# Altium PCB mdap4.PcbDoc (part 1 of 2)
Units mil, origin at the board's own origin, x right, y up, seen from the top; angles counter-clockwise.
Board outline 1970 x 1970 mil, 4 copper layers (Top Layer, Internal Plane 1, Signal Layer 1, Bottom Layer), stack 45.004 mil thick; 152 components, 121 nets, 477 pads, 250 vias.
Unrouted connection lines stored in the file: 1.
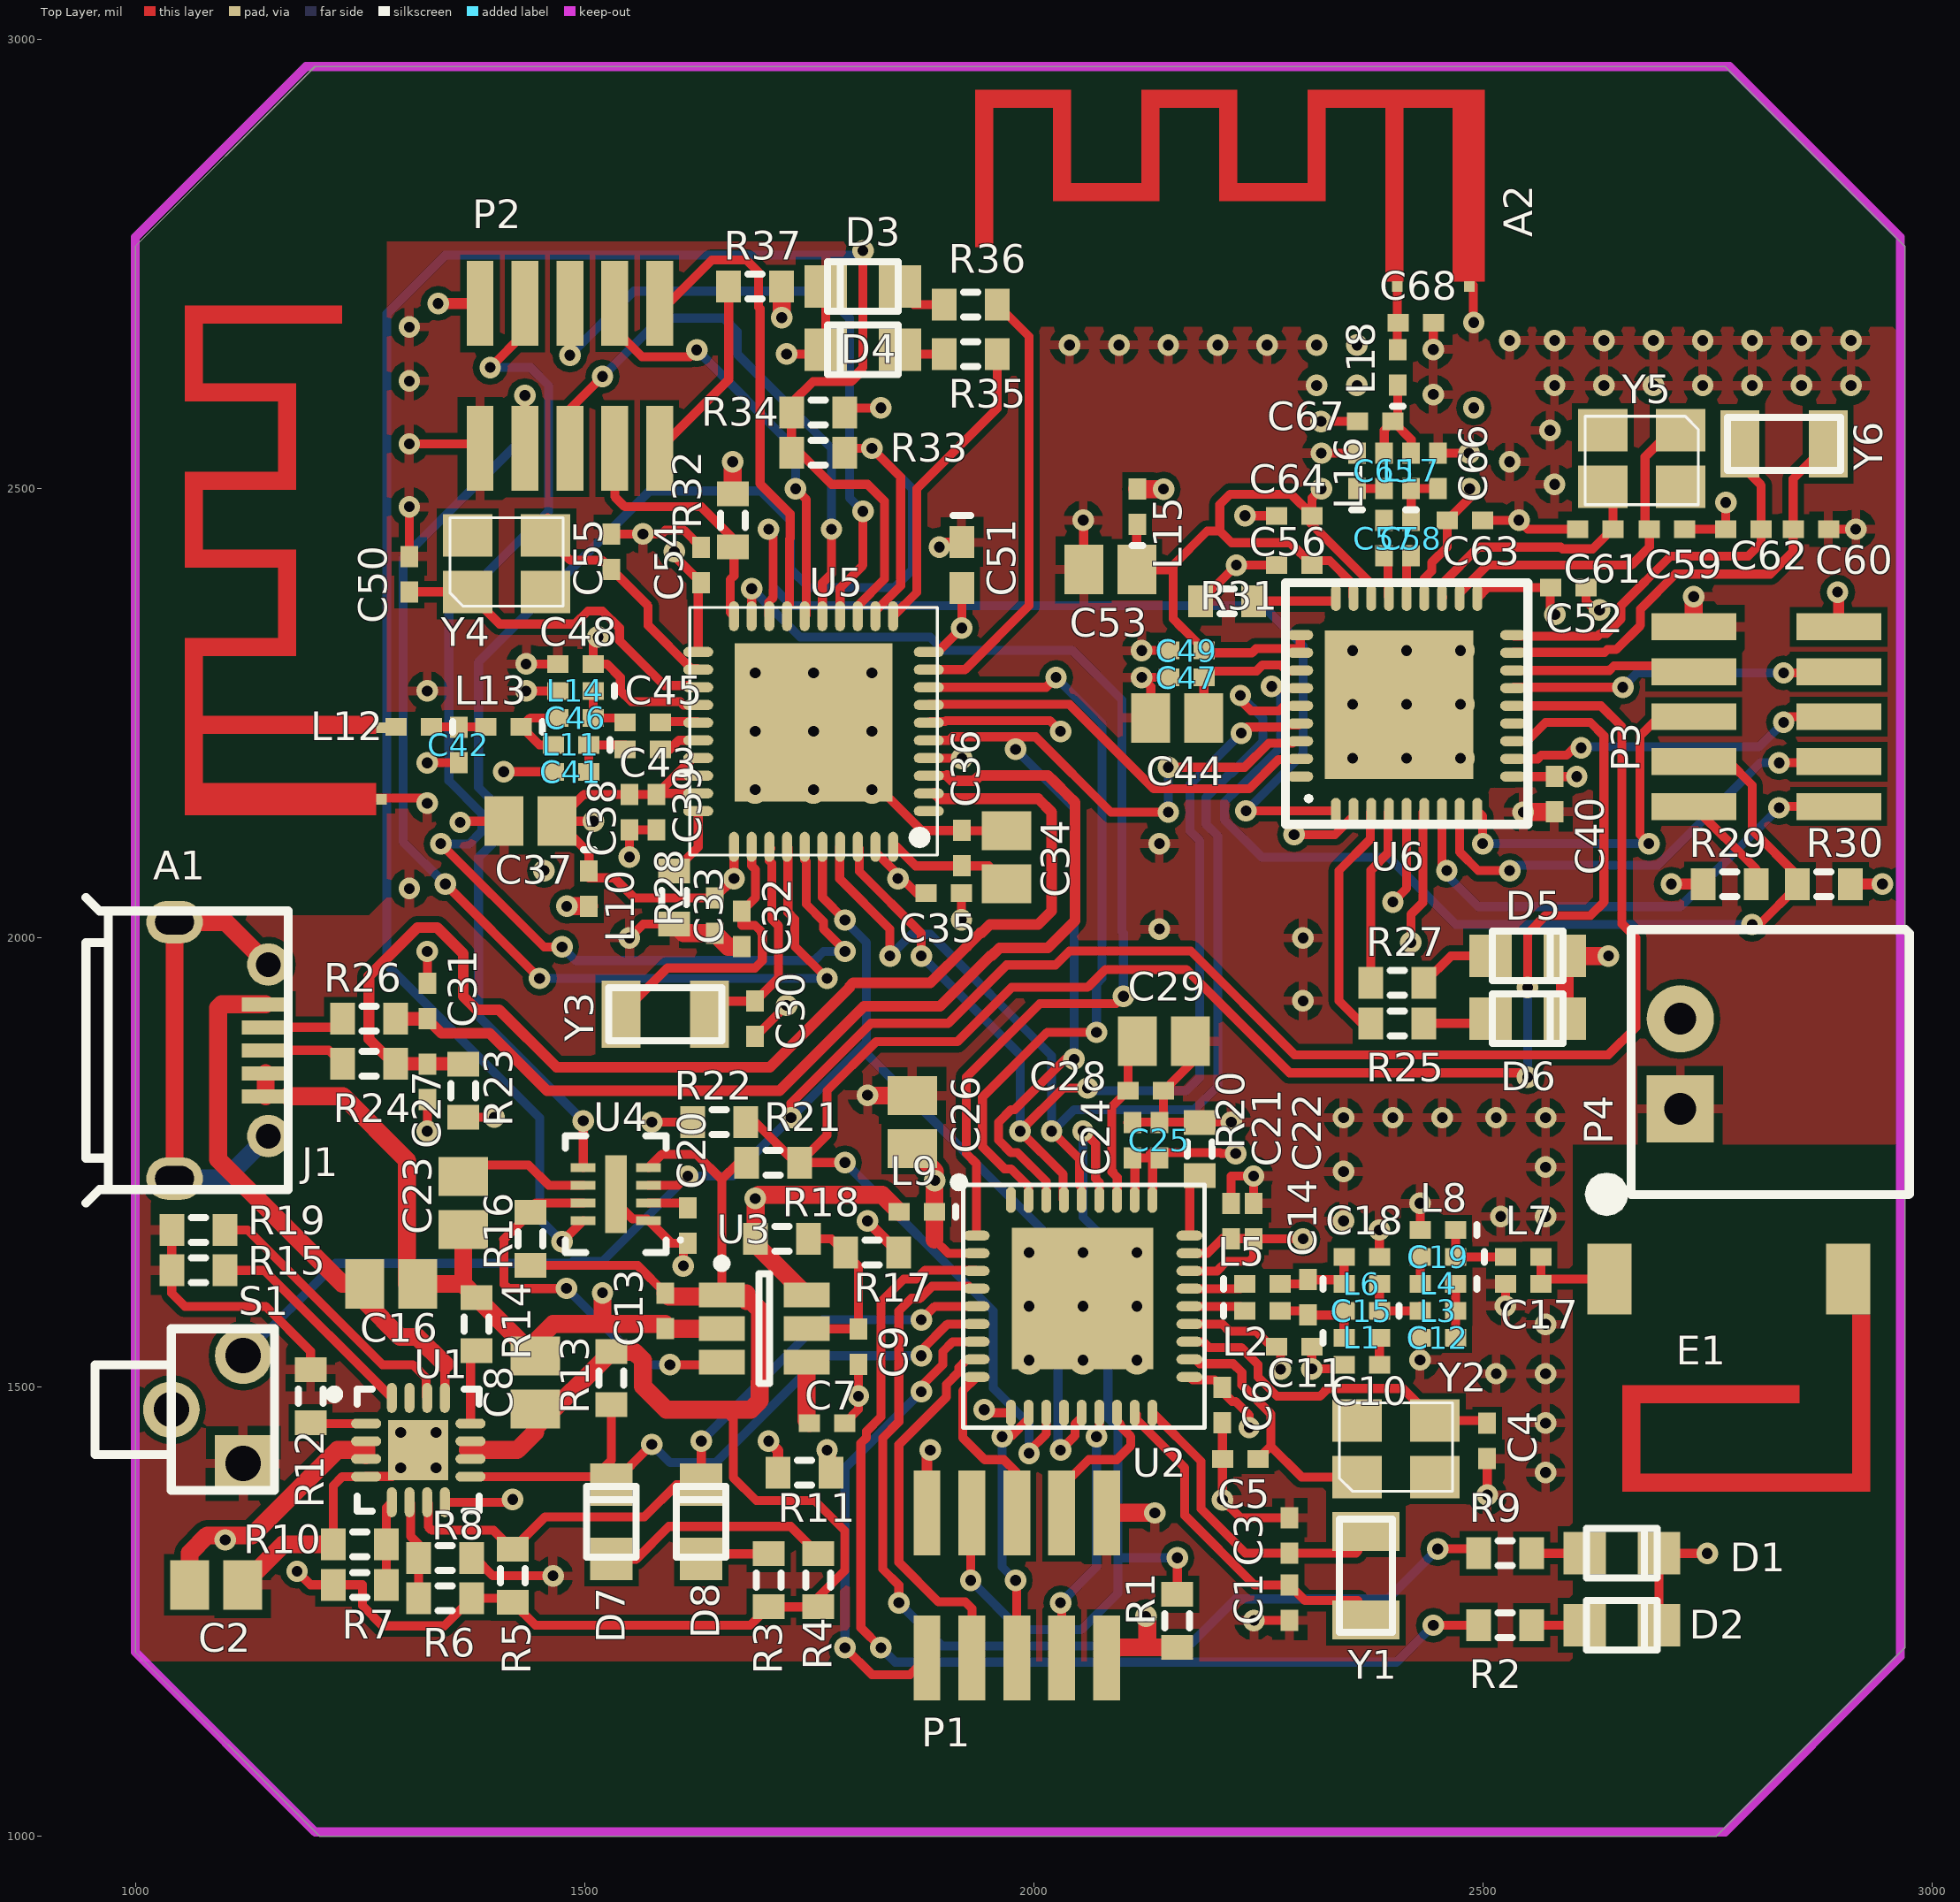
[diagram p0: Top Layer view]
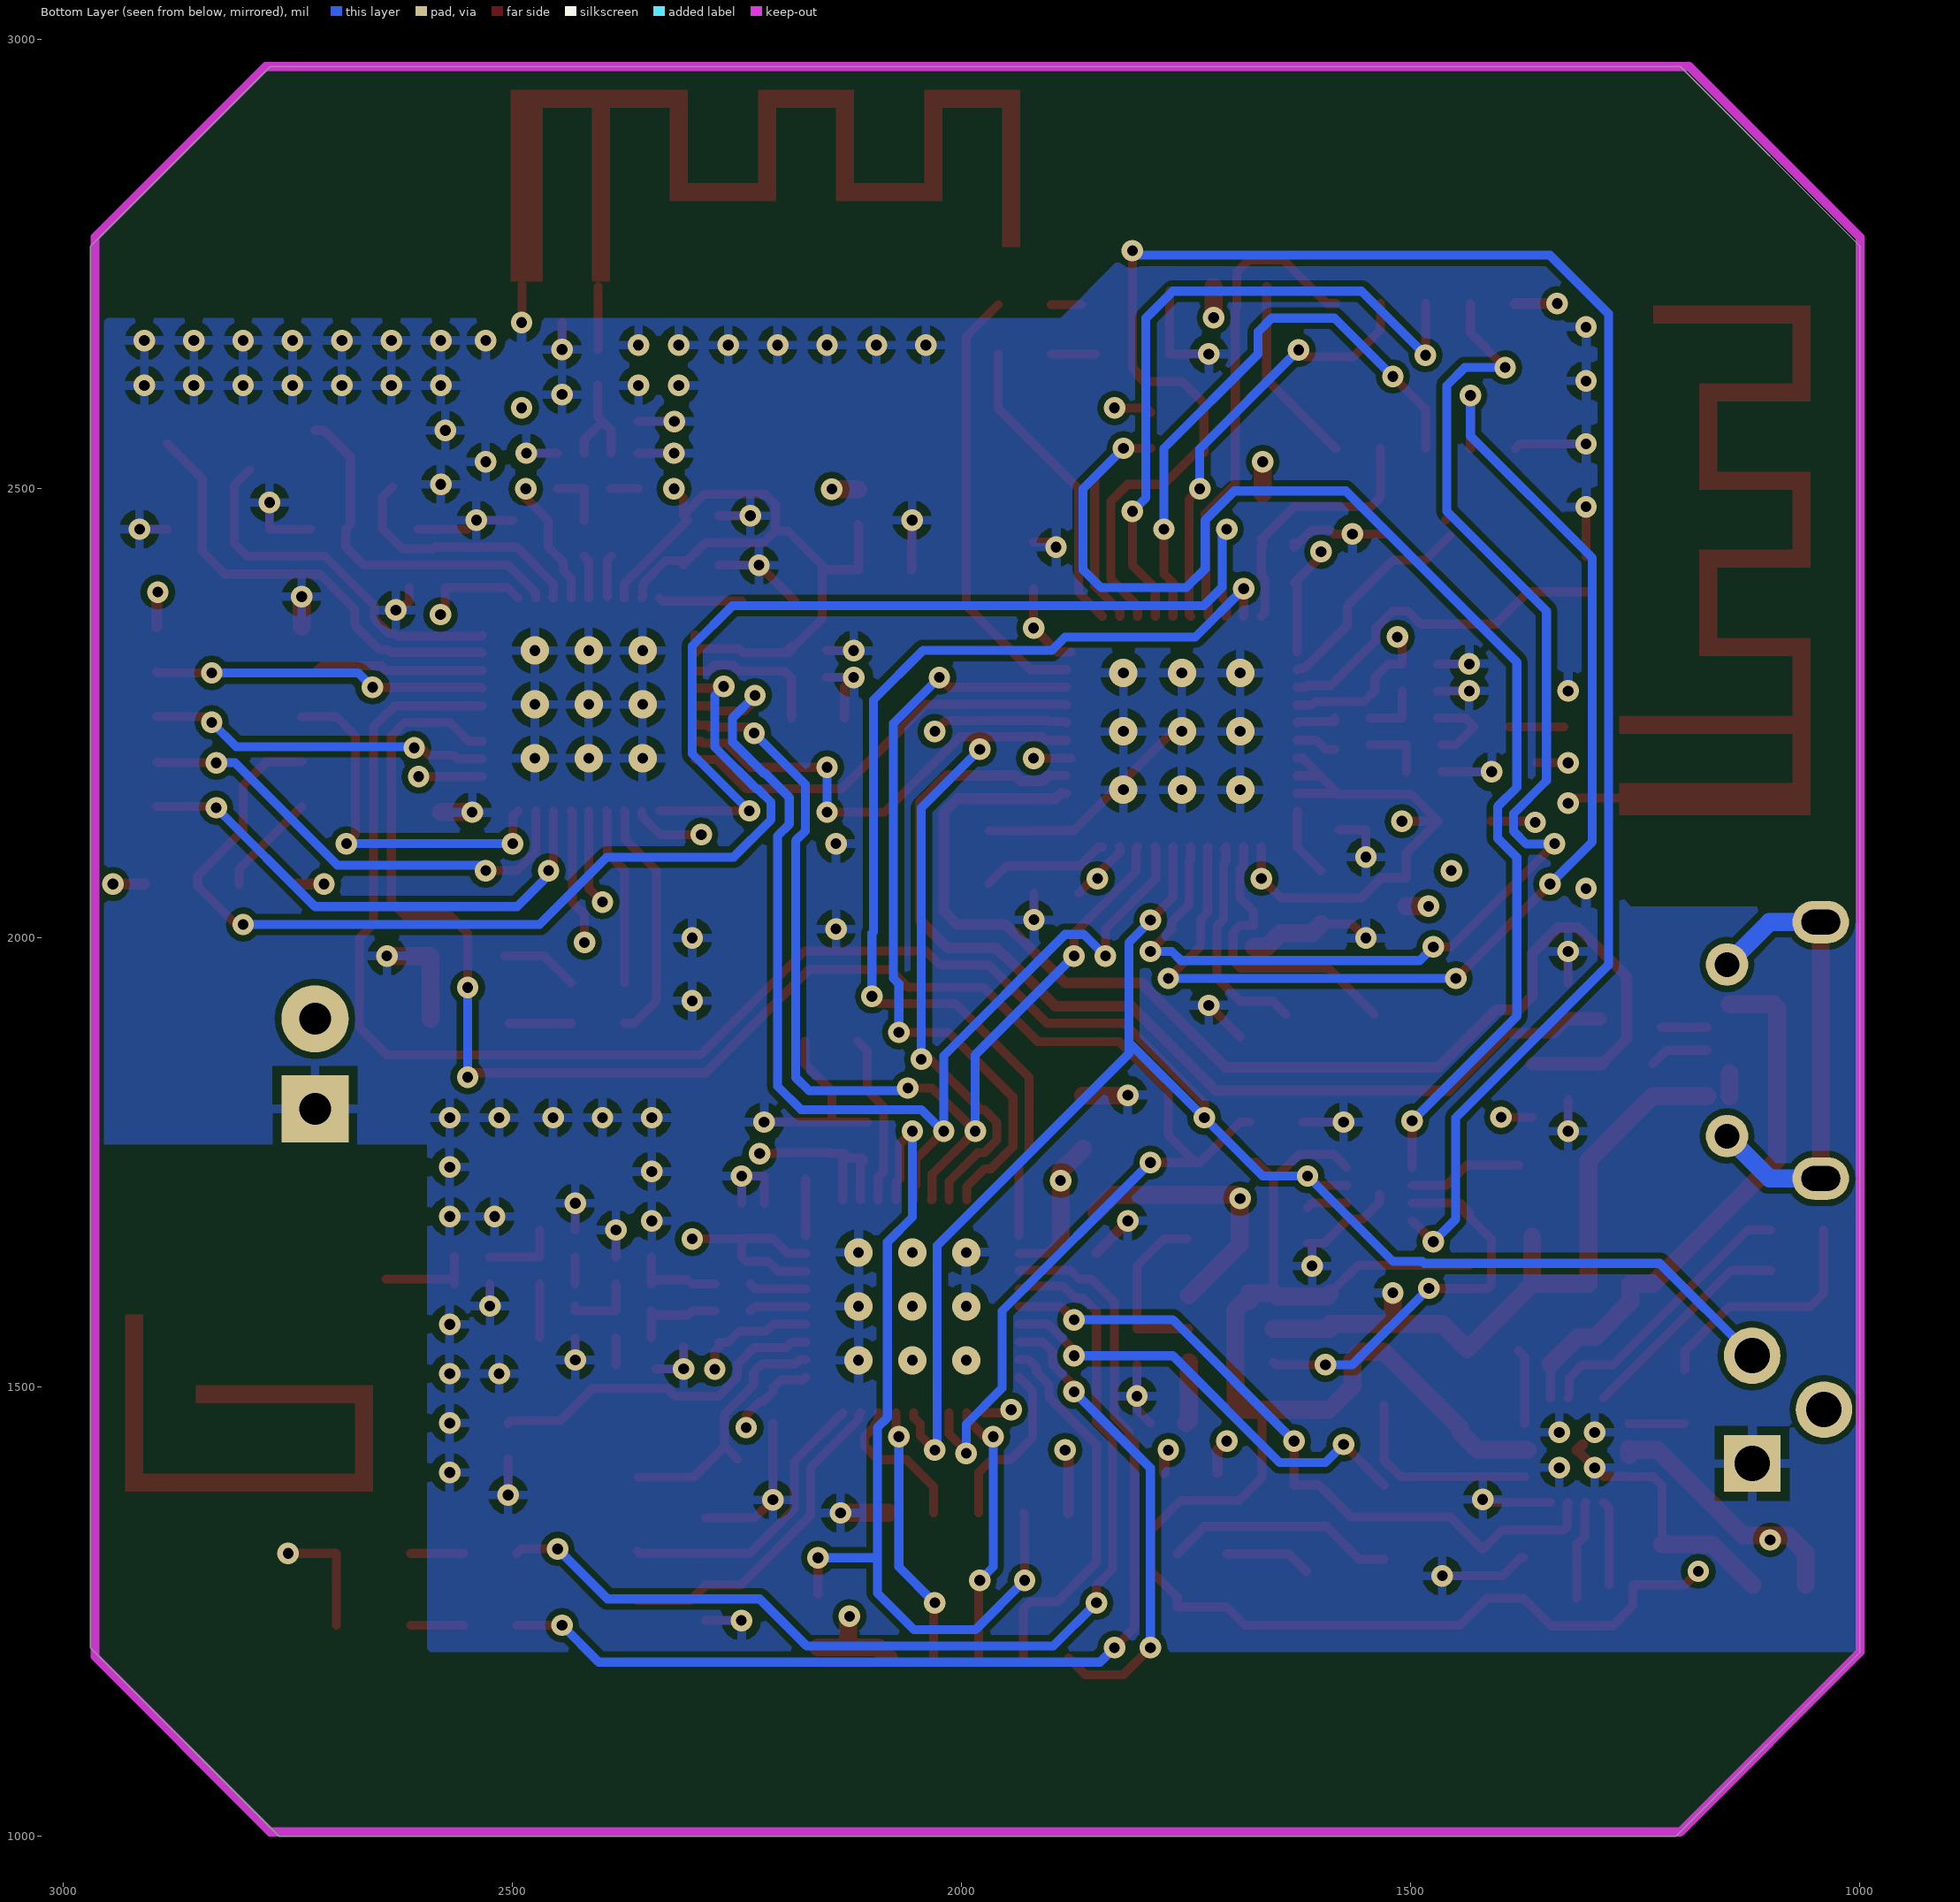
[diagram p1: Bottom Layer view, seen from below]
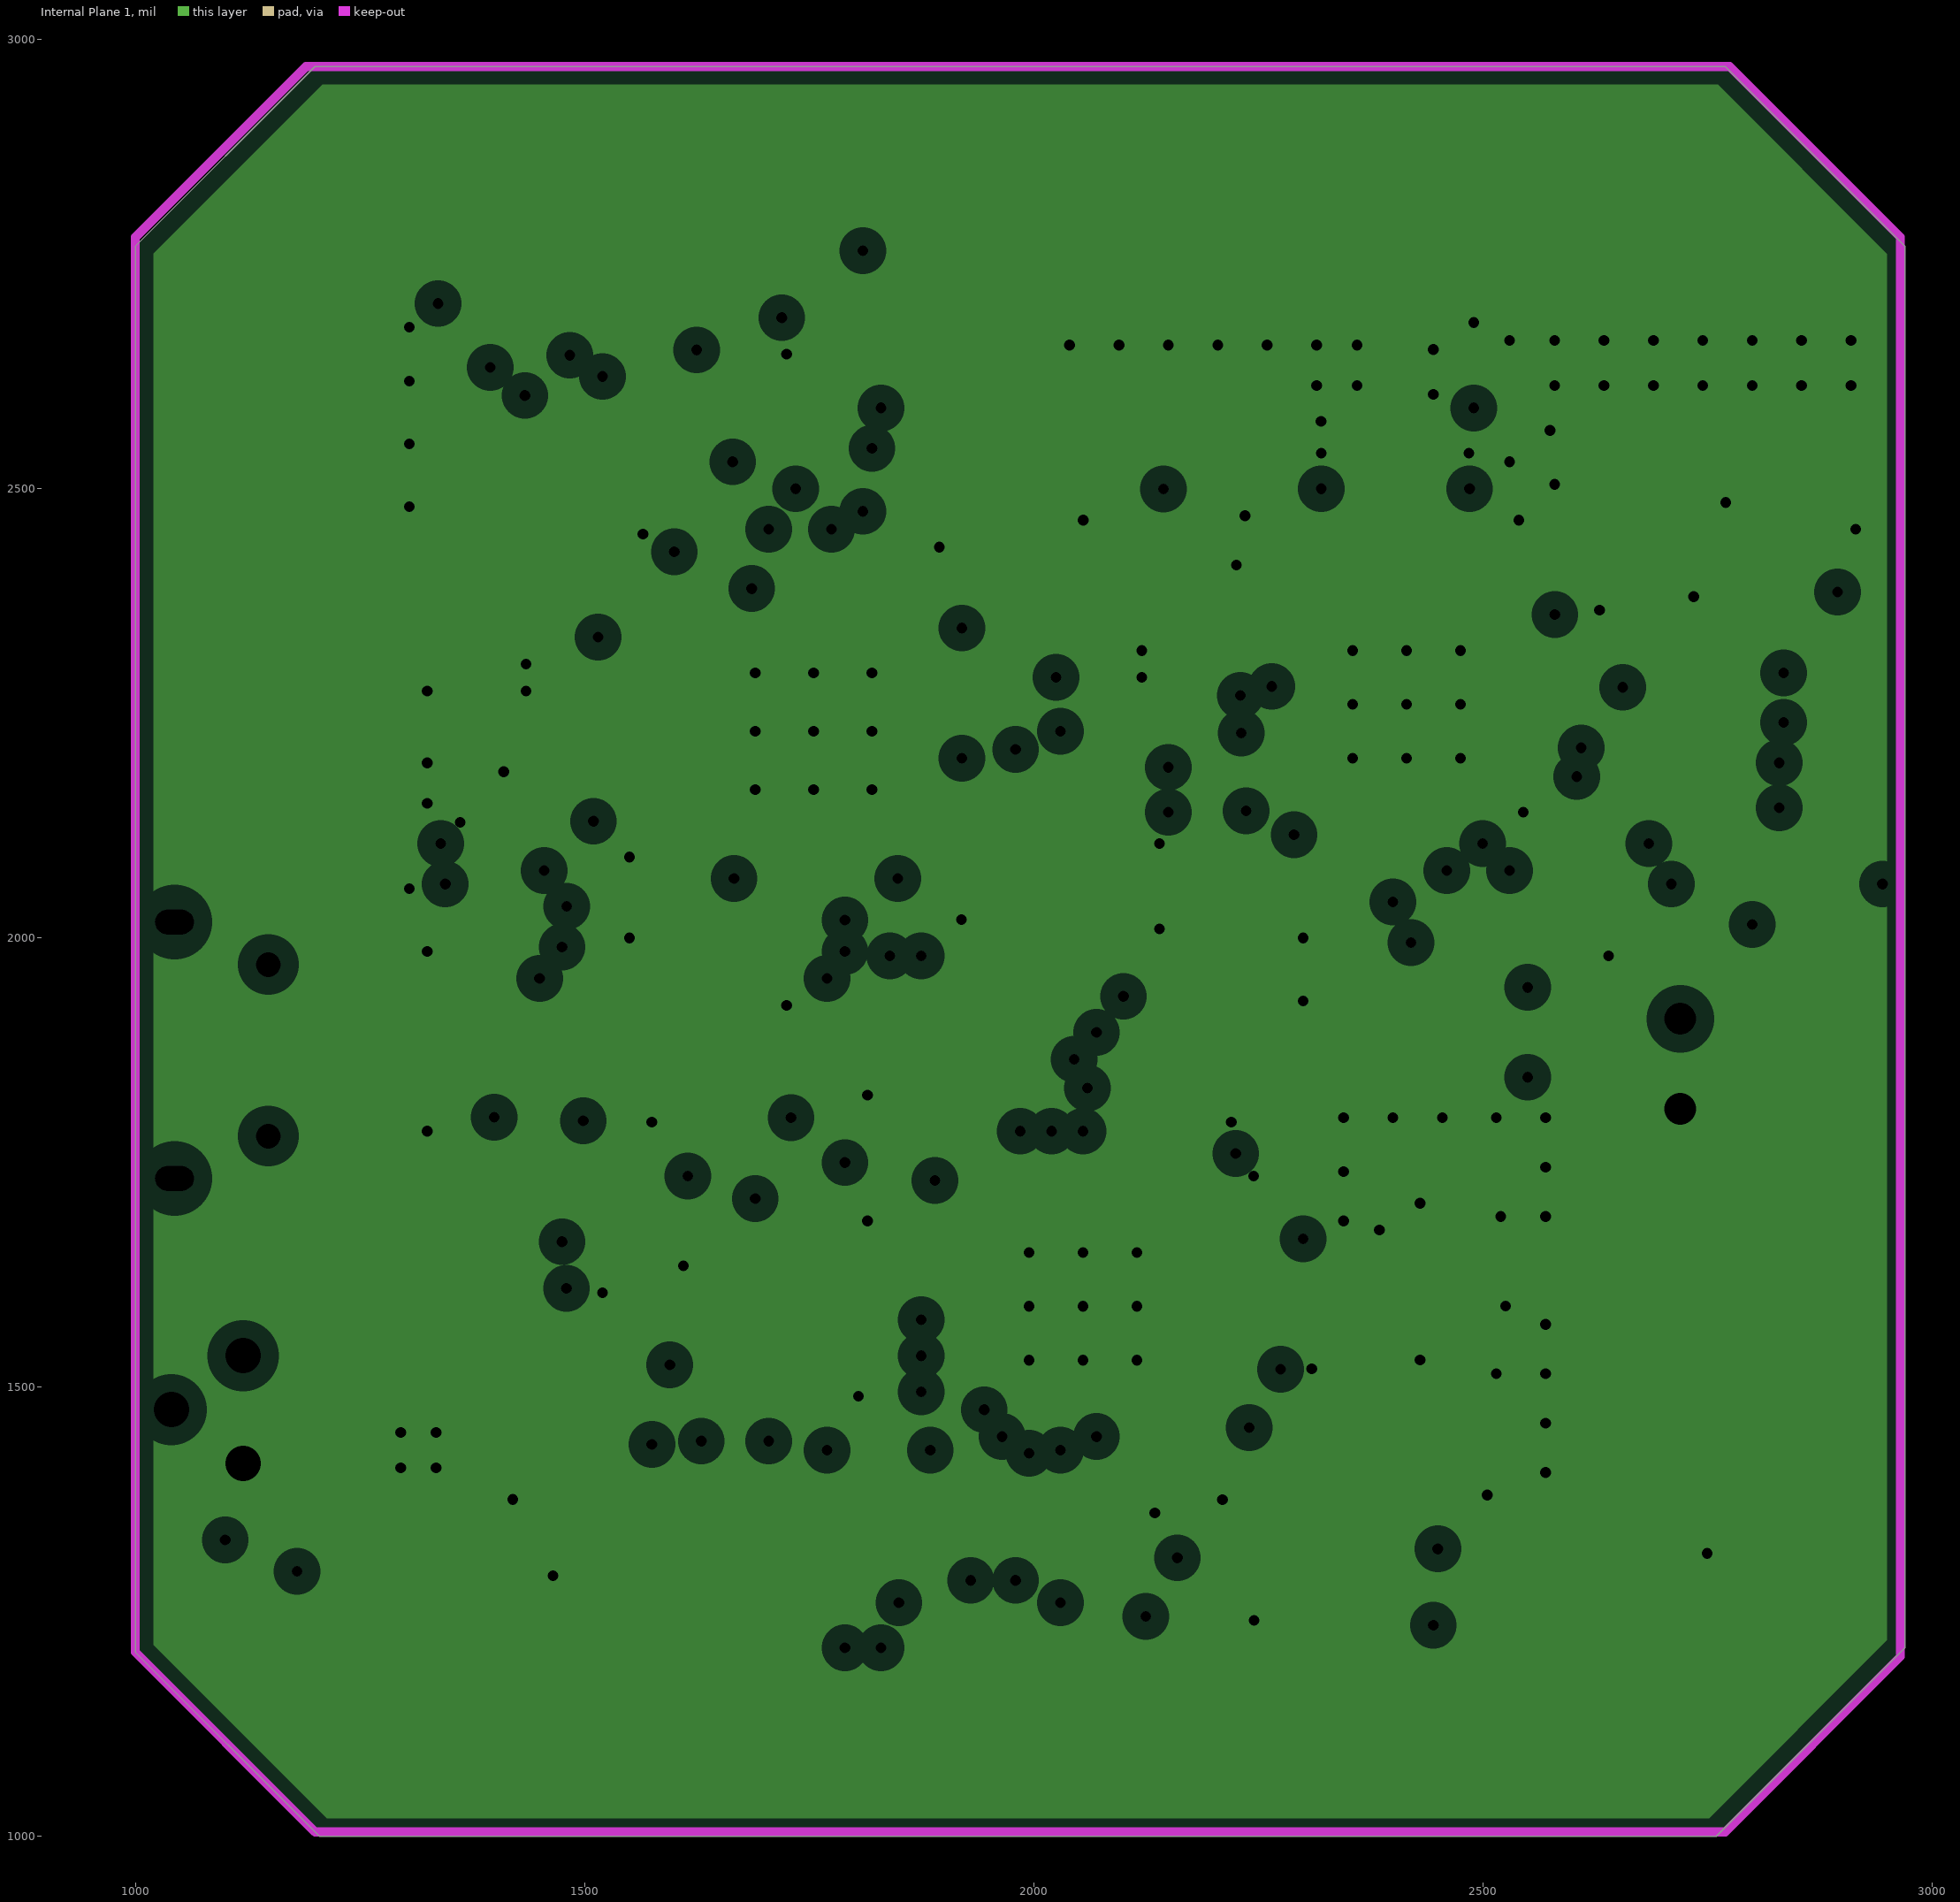
[diagram p2: Internal Plane 1, clearances drawn from the general rule]
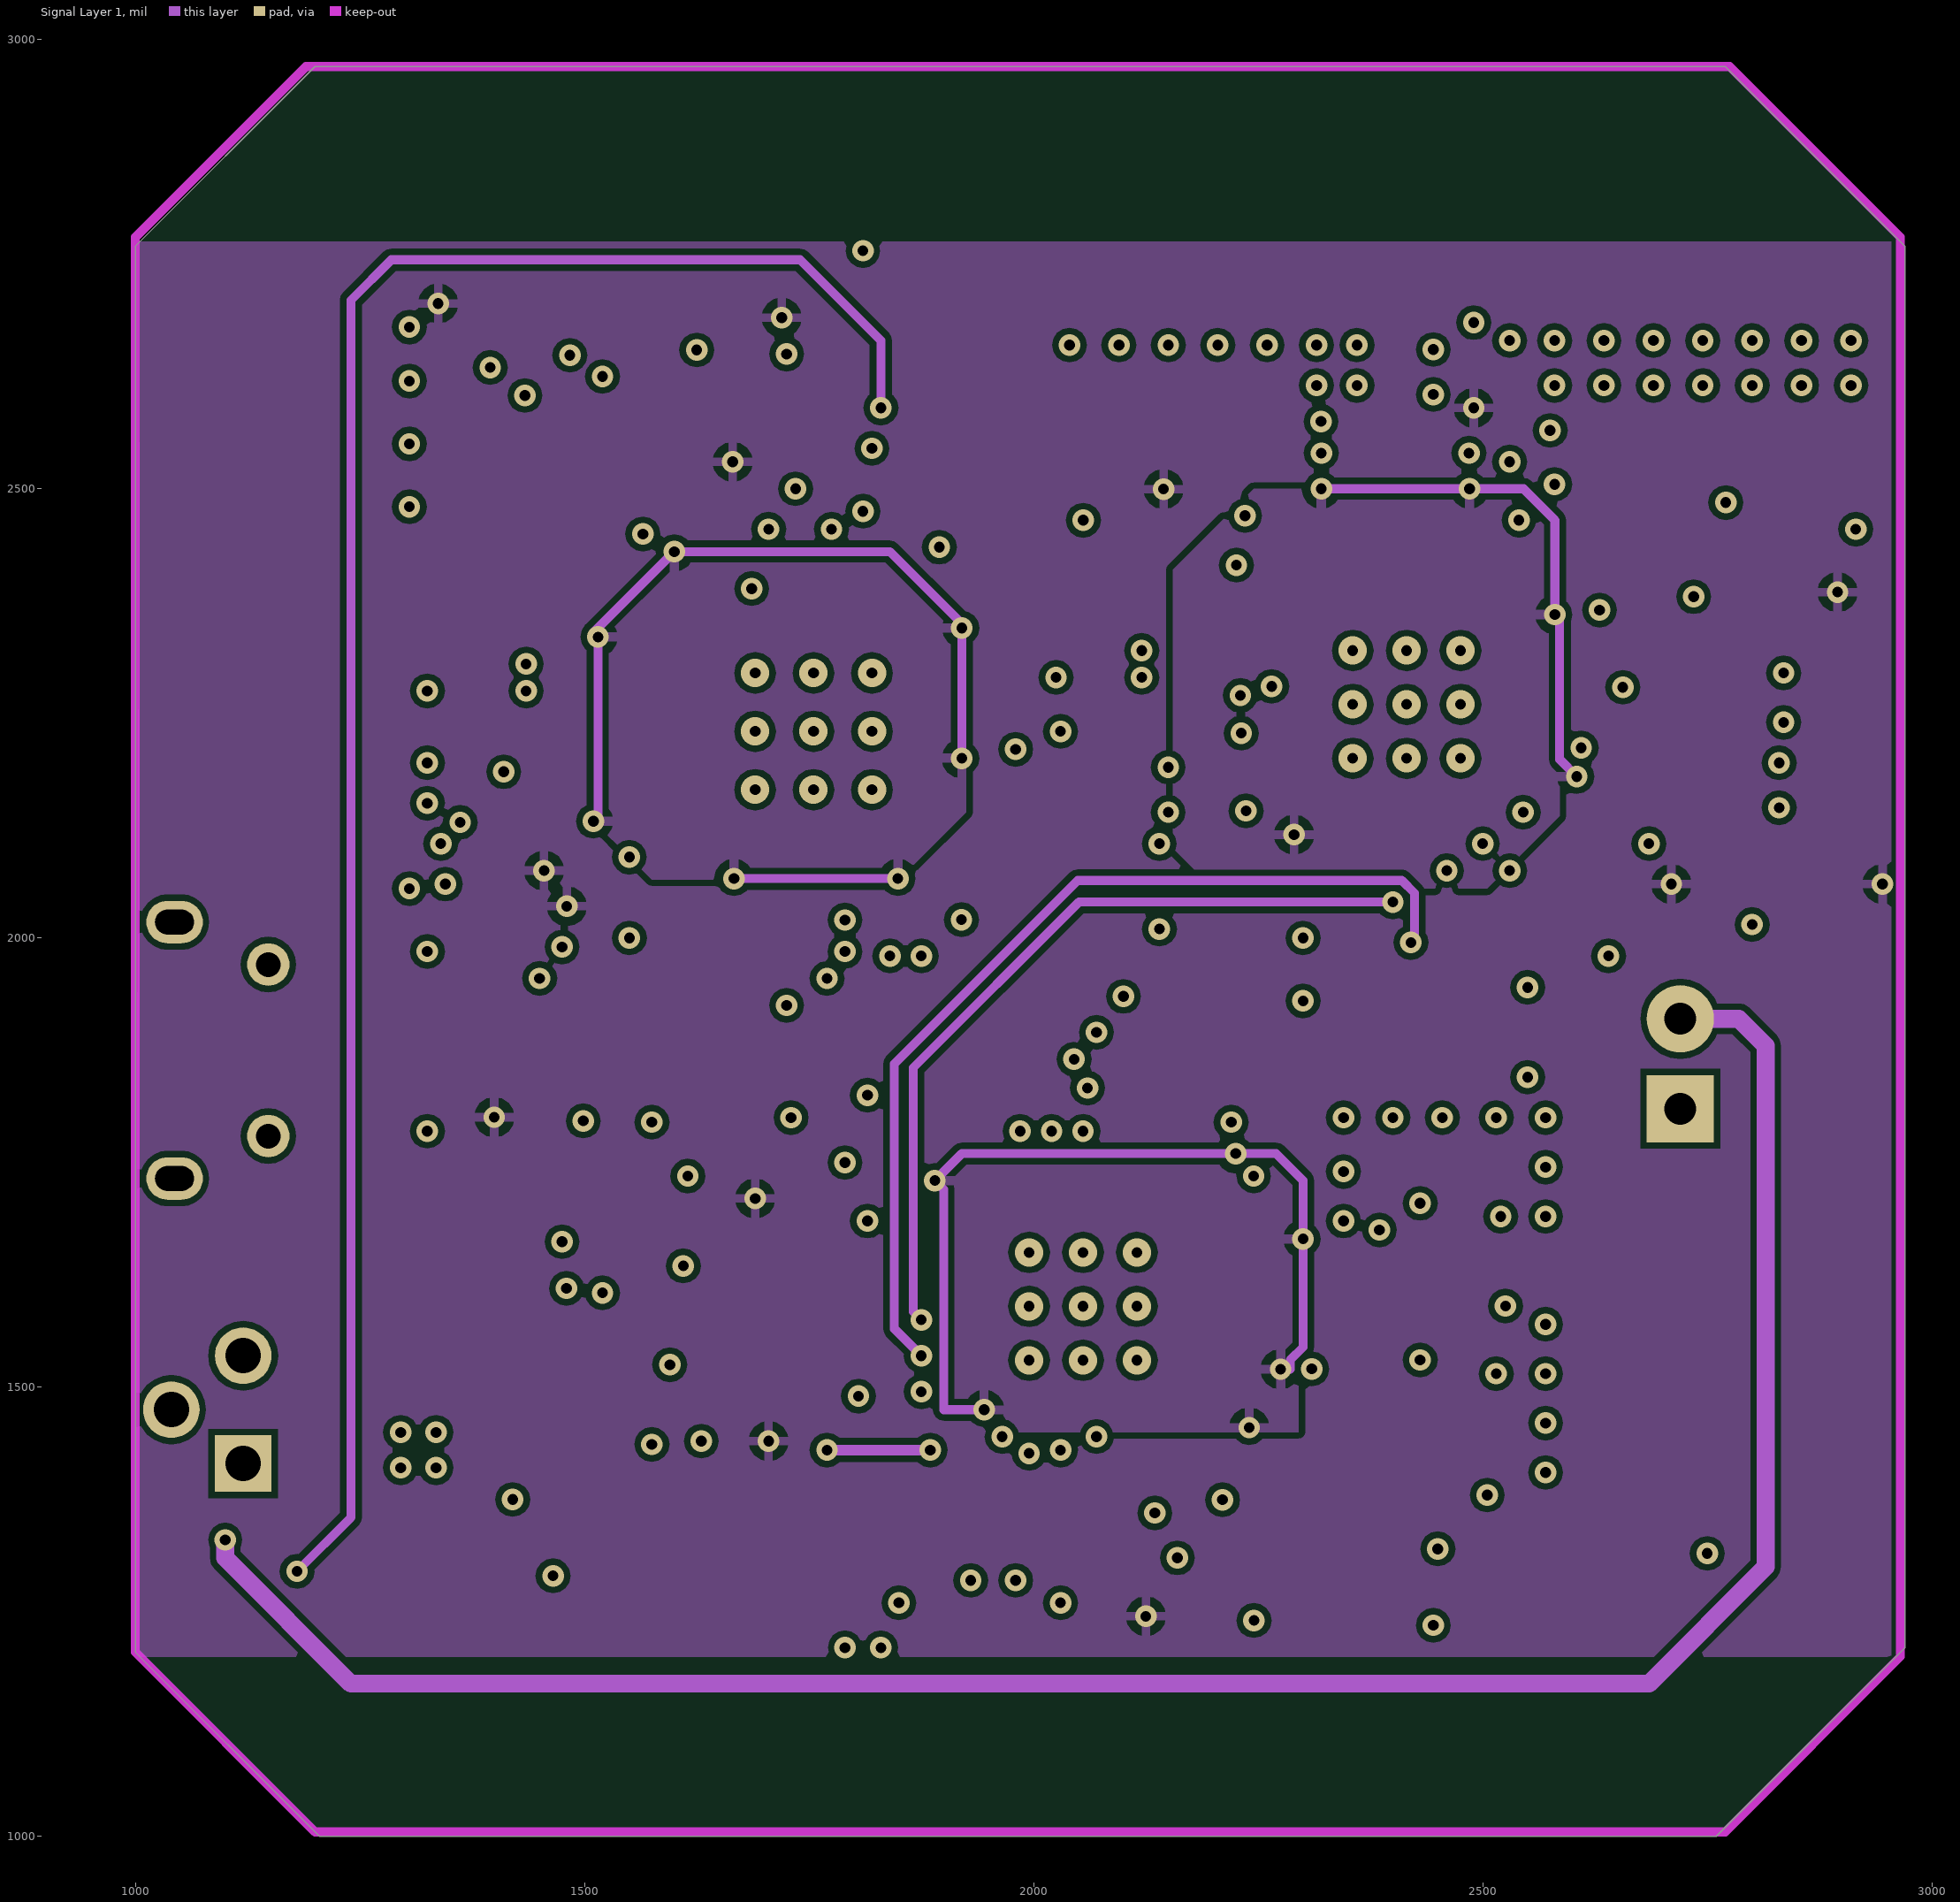
[diagram p3: Signal Layer 1]

## Layer stack, top to bottom
Top Solder: solder mask 0.4, Solder Resist, Dk 3.5
Top Layer: signal copper 1.4
Dielectric 1: core 7.874, FR-4, Dk 4.2
Internal Plane 1: plane copper 1.4169, net GND
Dielectric 3: prepreg 23.622, FR-4, Dk 4.2
Signal Layer 1: signal copper 1.4169
Dielectric 2: core 7.874, FR-4, Dk 4.2
Bottom Layer: signal copper 1.4
Bottom Solder: solder mask 0.4, Solder Resist, Dk 3.5

## Board outline
1205,1000 2760,1000 2970,1210 2970,2770 2770,2970 1200,2970 1000,2770 1000,1205

## Design rules (kind name [scope] priority, off if disabled: settings)
Clearance [OnCopper vs OnCopper] p1: gap=7 except(8: Via-Via Track-Track)
ComponentClearance [OnCopper vs OnCopper] p1 off: gap=6 collisioncheckmode=3 verticalgap=10 showdistances=FALSE
DiffPairsRouting [All] p1: maxlimit=14 minlimit=10 mostfreqgap=14 toplayer_minwidth=10 toplayer_maxwidth=12 toplayer_prefwidth=12 midlayer1_minwidth=10 midlayer1_maxwidth=2 midlayer1_prefwidth=12 bottomlayer_minwidth=10 bottomlayer_maxwidth=2 bottomlayer_prefwidth=12 maxuncoupledlength=500
HoleSize [All] p1: absolutevalues=TRUE maxlimit=100 minlimit=12 maxpercent=80.000 minpercent=20.000
PlaneClearance [All] p1: clearance=20
PlaneConnect [All] p1: planeconnectstyle=Relief reliefexpansion=20 reliefentries=4 reliefconductorwidth=10 reliefairgap=10
PolygonConnect [All] p1: connectstyle=Relief reliefconductorwidth=10 reliefentries=4 polygonreliefangle="90 Angle" airgapwidth=10
RoomDefinition U_CC2540 [InComponentClass('U_CC2540')] p1: confinementstyle=ConfineIn formatcopy=TRUE lockcomponents=FALSE outline 1045,1770 2015,1770 2015,2715 1045,2715
RoomDefinition U_cc2510 [InComponentClass('U_cc2510')] p2: confinementstyle=ConfineIn formatcopy=TRUE lockcomponents=FALSE outline 1925,2025 2940,2025 2940,2955 1925,2955
RoomDefinition U_cc1110 [InComponentClass('U_cc1110')] p3: confinementstyle=ConfineIn formatcopy=TRUE lockcomponents=FALSE outline 1685,1205 2970,1205 2970,1930 1685,1930
RoomDefinition U_Alim [InComponentClass('U_Alim')] p4: confinementstyle=ConfineIn formatcopy=TRUE lockcomponents=FALSE outline 1010,1235 2835,1235 2835,2790 1010,2790
RoomDefinition TOP [InComponentClass('TOP')] p5: confinementstyle=ConfineIn formatcopy=TRUE lockcomponents=FALSE outline 930,1115 2990,1115 2990,2760 930,2760
RoutingVias [All] p1: holewidth=15 width=30 viastyle="Through Hole" minholewidth=12 minwidth=24 maxholewidth=28 maxwidth=50
SMDNeckDown [All] p1: percent=75.000
SolderMaskExpansion [All] p1: expansion=4
UnpouredPolygon [All] p1: allowunpoured=FALSE
Width [All] p1: maxlimit=24 minlimit=6 preferedwidth=10
24 further rules are at their usual default settings.

## Classes and differential pairs
component class U_CC2540: A1 C27 C30 C31 C32 C33 C34 C35 C36 C37 C38 C39 C41 C42 C43 C45 C46 C48 C50 C51 C54 C55 L10 L11 L12 L13 L14 R23 R24 R26 R28 R32 U5 Y3 Y4
component class U_cc2510: A2 C40 C44 C47 C49 C52 C53 C56 C57 C58 C59 C60 C61 C62 C63 C64 C65 C66 C67 C68 L15 L16 L17 L18 R30 R31 U6 Y5 Y6
component class U_cc1110: C1 C3 C4 C5 C6 C10 C11 C12 C14 C15 C17 C18 C19 C21 C22 C24 C25 C26 C28 C29 E1 L1 L2 L3 L4 L5 L6 L7 L8 L9 R11 R20 U2 Y1 Y2
component class U_Alim: C2 C7 C8 C9 C13 C16 C20 C23 D3 D7 P2 R9 R13 R14 R15 R16 R17 R18 R19 R21 R27 R29 R33 R34 R35 R36 R37 U1 U3 U4
component class TOP: D1 D2 D5 D6 D7 D8 J1 P1 P3 P4 R9 R21 R22 R25 R27 R29 R33 R35 R36 R37 S1
differential pair D: +D_P -D_N

## Components (designator, comment, footprint, x,y, rotation, side; value= is the part's Value field where it differs from the comment)
A1 "Antenna_IIFA_1" ANTENNA_IIFA_1#1 1353.8,2109.17 r0 top
A2 "Antenna_IIFA_1" ANTENNA_IIFA_1#2 2530,2645 r90 top
C1 "Cap" 0402#1 2285,1260 r90 top
C2 "Cap" C0805 1090,1280 r180 top
C3 "Cap" 0402#1 2285,1335 r270 top
C4 "Cap" 0402#1 2505,1440 r90 top
C5 "Cap" 0402#1 2230,1420 r0 top
C6 "Cap" 0402#1 2210,1480 r90 top
C7 "Cap" 0402#1 1770,1460 r180 top
C8 "Cap" C0805 1445,1505 r270 top
C9 "Cap" 0402#1 1805,1545 r90 top
C10 "Cap" 0402#1 2365.31,1525 r0 top
C11 "Cap" 0402#1 2290,1545 r180 top
C12 "Cap" 0402#1 2450,1555 r0 top
C13 "Cap" 0402#1 1590,1585 r90 top
C14 "Cap" 0402#1 2305.31,1600 r270 top
C15 "Cap" 0402#1 2365.31,1585 r180 top
C16 "Cap" C0805 1285,1615 r180 top
C17 "Cap" 0402#1 2545,1615 r180 top
C18 "Cap" 0402#1 2365.31,1645 r180 top
C19 "Cap" 0402#1 2450.31,1645 r180 top
C20 "Cap" 0402#1 1615,1680 r90 top
C21 "Cap" 0402#1 2220,1685 r270 top
C22 "Cap" 0402#1 2245,1685 r270 top
C23 "Cap" C0805 1365,1705 r90 top
C24 "Cap" 0402#1 2110,1775 r270 top
C25 "Cap" 0402#1 2140,1775 r270 top
C26 "Cap" C0805 1865,1795 r270 top
C27 "Cap" 0402#1 1325,1840 r270 top
C28 "Cap" 0402#1 2125,1830 r0 top
C29 "Cap" C0805 2145,1885 r0 top
C30 "Cap" 0402#1 1690,1910 r90 top
C31 "Cap" 0402#1 1325,1930 r90 top
C32 "Cap" 0402#1 1675,2010 r90 top
C33 "Cap" 0402#1 1645,2025 r90 top
C34 "Cap" C0805 1970,2090 r270 top
C35 "Cap" 0402#1 1900,2050 r180 top
C36 "Cap" 0402#1 1920,2100 r270 top
C37 "Cap" C0805 1440,2130 r0 top
C38 "Cap" 0402#1 1550,2140 r90 top
C39 "Cap" 0402#1 1580,2140 r90 top
C40 "Cap" 0402#1 2580,2160 r90 top
C41 "Cap" 0402#1 1485,2185 r0 top
C42 "Cap" 0402#1 1360,2215 r90 top
C43 "Cap" 0402#1 1565,2210 r0 top
C44 "Cap" C0805 2160,2245 r180 top
C45 "Cap" 0402#1 1565,2240 r0 top
C46 "Cap" 0402#1 1490,2245 r0 top
C47 "Cap" 0402#1 2170.32,2290 r180 top
C48 "Cap" 0402#1 1490,2305 r0 top
C49 "Cap" 0402#1 2170.32,2320 r0 top
C50 "Cap" 0402#1 1305,2405 r270 top
C51 "Cap" 0402#2 1920,2415 r270 top
C52 "Cap" 0402#1 2595.32,2390 r180 top
C53 "Cap" C0805 2085.32,2410 r0 top
C54 "Cap" 0402#1 1630,2415 r270 top
C55 "Cap" 0402#1 1530,2430 r270 top
C56 "Cap" 0402#1 2290.32,2415 r0 top
C57 "Cap" 0402#1 2390.32,2445 r270 top
C58 "Cap" 0402#1 2420.32,2445 r270 top
C59 "Cap" 0402#1 2705.32,2455 r180 top
C60 "Cap" 0402#1 2865.32,2455 r180 top
C61 "Cap" 0402#1 2625.32,2455 r0 top
C62 "Cap" 0402#1 2790.32,2455 r0 top
C63 "Cap" 0402#1 2480.32,2465 r180 top
C64 "Cap" 0402#1 2290.32,2470 r0 top
C65 "Cap" 0402#1 2390.32,2520 r270 top
C66 "Cap" 0402#1 2450.32,2520 r270 top
C67 "Cap" 0402#1 2380.32,2575 r0 top
C68 "Cap" 0402#1 2425.32,2685 r180 top
D1 "ROJO" LED_0805 2655,1315 r0 top
D2 "VERDE" LED_0805 2655,1235 r0 top
D3 "ROJO" LED_0805 1810,2725 r180 top
D4 "VERDE" LED_0805 1810,2655 r180 top
D5 "ROJO" LED_0805 2550,1980 r0 top
D6 "VERDE" LED_0805 2550,1910 r0 top
D7 "ROJO" LED_0805 1530,1350 r90 top (schematic designator D400)
D8 "VERDE" LED_0805 1630,1350 r90 top (schematic designator D401)
E1 "Antenna Chip" JOHANSON_0868AT43A0020 2700.31,1690 r0 top
J1 "440247-1" USB_C10418 1145,1875 r90 top
L1 "Inductor" 0402-A 2365.31,1555 r0 top
L2 "Inductor" 0402-A 2255,1585 r0 top
L3 "Inductor" 0402-A 2450.31,1585 r0 top
L4 "Inductor" 0402-A 2450.31,1615 r180 top
L5 "Inductor" 0402-A 2255,1615 r0 top
L6 "Inductor" 0402-A 2365.31,1615 r0 top
L7 "Inductor" 0402-A 2545,1645 r0 top
L8 "Inductor" 0402-A 2450,1675 r180 top
L9 "Inductor" 0402-A 1870,1695 r180 top
L10 "Inductor" 0402-A 1505,2055 r270 top
L11 "Inductor" 0402-A 1485,2215 r180 top
L12 "Inductor" 0402-A 1310,2235 r180 top
L13 "Inductor" 0402-A 1410,2235 r180 top
L14 "Inductor" 0402-A 1490,2275 r180 top
L15 "Inductor" 0402-A 2115.32,2480 r90 top
L16 "Inductor" 0402-A 2360.32,2520 r90 top
L17 "Inductor" 0402-A 2420.32,2520 r90 top
L18 "Inductor" 0402-A 2405.32,2635 r90 top
P1 "Header 5X2" stl21 1725,1280 r90 top
P2 "Header 5X2" stl21 1740,2625 r270 top locked
P3 "Header 5X2" stl21 2815,1990 r180 top
P4 "Battery" MOLEX_5268-2 2720,1810 r90 top
R1 "Res3" J1-0603 2160,1240 r270 top
R2 "Res3" J1-0603 2525,1235 r0 top
R3 "Res3" J1-0603 1705,1285 r270 top
R4 "Res3" J1-0603 1760,1285 r270 top
R5 "Res3" J1-0603 1420,1290 r270 top
R6 "Res3" J1-0603 1345,1265 r0 top
R7 "Res3" J1-0603 1250,1280 r180 top
R8 "Res3" J1-0603 1345,1310 r180 top
R9 "Res3" J1-0603 2525,1315 r0 top
R10 "Res3" J1-0603 1250,1325 r0 top
R11 "Res3" J1-0603 1745,1405 r0 top
R12 "Res3" J1-0603 1195,1490 r270 top
R13 "Res3" J1-0603 1530,1510 r90 top
R14 "Res3" J1-0603 1380,1570 r270 top
R15 "Res3" J1-0603 1070,1630 r0 top
R16 "Res3" J1-0603 1440,1665 r270 top
R17 "Res3" J1-0603 1820,1650 r180 top
R18 "Res3" J1-0603 1720,1665 r180 top
R19 "Res3" J1-0603 1070,1675 r0 top
R20 "Res3" J1-0603 2185,1765 r270 top
R21 "Res3" J1-0603 1710,1750 r180 top
R22 "Res3" J1-0603 1650,1795 r0 top
R23 "Res3" J1-0603 1365,1830 r270 top
R24 "Res3" J1-0603 1260,1860 r0 top
R25 "Res3" J1-0603 2405,1905 r0 top
R26 "Res3" J1-0603 1260,1910 r0 top
R27 "Res3" J1-0603 2405,1950 r0 top
R28 "Res3" J1-0603 1600,2045 r90 top
R29 "Res3" J1-0603 2775,2060 r0 top
R30 "Res3" J1-0603 2880,2060 r0 top
R31 "Res3" J1-0603 2215.32,2375 r0 top
R32 "Res3" J1-0603 1665,2465 r90 top
R33 "Res3" J1-0603 1760,2540 r180 top
R34 "Res3" J1-0603 1760,2585 r0 top
R35 "Res3" J1-0603 1930,2650 r180 top
R36 "Res3" J1-0603 1930,2705 r180 top
R37 "Res3" J1-0603 1690,2725 r180 top
S1 "SW-PB" puls_C3682 1120,1415 r0 top
U1 "BQ24232RGTR" RGT16-1700X1700TP_SP 1315,1430 r0 top
U2 "CC1110" "QLP36_4_4 (REFLOW)" 2055,1590 r0 top
U3 "TPS79301" SOT26A-6M 1700,1565 r0 top
U4 "LTC2950CDDB-1" DDB8 1535,1715 r180 top
U5 "CC2540" "QFN40_RHA (DATASHEET)" 1755,2230 r180 top
U6 "CC2510" "QLP36_4_4 NORTEAM SILK (REFLOW)" 2415.32,2260 r90 top
Y1 "32K768" XTAL_3215 2370,1290 r270 top
Y2 "26MHz" XTAL_3225 2360,1400 r0 top (schematic designator Y100)
Y3 "32K768" XTAL_3215 1590,1915 r180 top (schematic designator Y301)
Y4 "32MHz" XTAL_3225 1370,2385 r0 top (schematic designator Y300)
Y5 "26MHz" XTAL_3225 2720.32,2565 r180 top (schematic designator Y200)
Y6 "32K768" XTAL_3215 2835.32,2550 r0 top (schematic designator Y201)

## Footprints (in the part's own frame and the unit in brackets; to place one, negate y for a bottom-side part, rotate by r counter-clockwise, add the part's x,y. Pads: shape width x height; smd on the part's side, far side on the other; paste and mask are expansions set on the pad)
0402#1 [mm] "Chip Capacitor, Body 1.0x0.5mm, IPC High Density"
  rect 0.6x0.5 smd: 1(-0.5,0) 2(0.5,0)
  body extent -0.55,-0.3 0.55,0.3, height 1.3
0402#2 [mm] "Chip Capacitor; Body 1.0 x 0.5 mm (LxW typ)"
  rect 0.9x0.7 smd: 1(-0.65,0) 2(0.65,0)
  silkscreen extent -1.4,-0.25 -1.4,0.25
0402-A [mm] "Chip Inductor, Body 1.0x0.5mm, IPC High Density"
  rect 0.6x0.5 smd: 1(-0.5,0) 2(0.5,0)
  silkscreen extent -1.1,-0.15 -1.1,0.15, body extent -0.55,-0.3 0.55,0.3, height 0.55
ANTENNA_IIFA_1#1 [mm]
  rect 0.3x0.3 smd paste-0.3 mask-0.3: 1(-2.032,3.175) 2(-2.032,1.143)
  Top Layer region: -7.589,0.703 -7.089,0.703 -7.089,5.703 -7.589,5.703
  Top Layer region: -7.589,3.003 -2.18,3.003 -2.18,3.503 -7.589,3.503
  Top Layer region: -7.589,15.103 -3.149,15.103 -3.149,14.603 -7.589,14.603
  Top Layer region: -7.589,0.703 -2.18,0.703 -2.18,1.603 -7.589,1.603
  Top Layer region: -4.449,8.203 -7.589,8.203 -7.589,7.703 -4.449,7.703
  Top Layer region: -7.589,12.403 -7.089,12.403 -7.089,15.103 -7.589,15.103
  Top Layer region: -4.449,12.903 -7.589,12.903 -7.589,12.403 -4.449,12.403
  Top Layer region: -4.949,9.903 -4.449,9.903 -4.449,12.903 -4.949,12.903
  Top Layer region: -4.449,5.203 -7.589,5.203 -7.589,5.703 -4.449,5.703
  Top Layer region: -4.949,5.203 -4.449,5.203 -4.449,8.203 -4.949,8.203
  Top Layer region: -7.589,7.703 -7.089,7.703 -7.089,10.403 -7.589,10.403
  Top Layer region: -7.589,10.403 -4.449,10.403 -4.449,9.903 -7.589,9.903
ANTENNA_IIFA_1#2 [mm]
  rect 0.3x0.3 smd paste-0.3 mask-0.3: 1(2.032,3.175) 2(2.032,1.143)
  Top Layer region: 7.589,10.403 4.449,10.403 4.449,9.903 7.589,9.903
  Top Layer region: 7.589,7.703 7.089,7.703 7.089,10.403 7.589,10.403
  Top Layer region: 4.949,5.203 4.449,5.203 4.449,8.203 4.949,8.203
  Top Layer region: 4.449,5.203 7.589,5.203 7.589,5.703 4.449,5.703
  Top Layer region: 4.949,9.903 4.449,9.903 4.449,12.903 4.949,12.903
  Top Layer region: 4.449,12.903 7.589,12.903 7.589,12.403 4.449,12.403
  Top Layer region: 7.589,12.403 7.089,12.403 7.089,15.103 7.589,15.103
  Top Layer region: 4.449,8.203 7.589,8.203 7.589,7.703 4.449,7.703
  Top Layer region: 7.589,0.703 2.18,0.703 2.18,1.603 7.589,1.603
  Top Layer region: 7.589,15.103 3.149,15.103 3.149,14.603 7.589,14.603
  Top Layer region: 7.589,3.003 2.18,3.003 2.18,3.503 7.589,3.503
  Top Layer region: 7.589,0.703 7.089,0.703 7.089,5.703 7.589,5.703
C0805 [mm] "Chip Capacitor, Body 2.0x1.3mm, IPC High Density"
  rect 1.1x1.4 smd: 1(-0.75,0) 2(0.75,0)
  body extent -1.1,-0.72 1.1,0.72, height 1.4
DDB8 [mm] "SON, 8-Leads, Body 3x2 mm, Pitch 0.5mm, Linear Recommended"
  rect 0.7x0.25 smd: 1(-0.925,0.75) 2(-0.925,0.25) 3(-0.925,-0.25) 4(-0.925,-0.75) 5(0.925,-0.75) 6(0.925,-0.25) 7(0.925,0.25) 8(0.925,0.75)
  rect 0.61x2.2 smd: 9(0,0)
  silkscreen extent -1.88,-1.65 1.43,1.65, body extent -1,-1.5 1,1.5, height 0.8
J1-0603 [mm] "Chip Resistor, Body 1.6x0.8mm, IPC High Density"
  rect 0.7x0.9 smd: 1(-0.75,0) 2(0.75,0)
  silkscreen extent -0.2,-0.35 0.2,0.35, body extent -0.85,-0.48 0.85,0.48, height 0.9
JOHANSON_0868AT43A0020 [mm]
  rect 1.25x2 smd paste+0 mask+0.1: 1(-1.51,-1.77) 2(5.24,-1.77)
  Top Layer region: -0.635,-4.77 3.865,-4.77 3.865,-5.27 -0.635,-5.27
  Top Layer region: -1.135,-4.77 -0.635,-4.77 -0.635,-7.77 -1.135,-7.77
  Top Layer region: 5.365,-2.77 5.865,-2.77 5.865,-7.77 5.365,-7.77
  Top Layer region: -0.635,-7.27 5.365,-7.27 5.365,-7.77 -0.635,-7.77
  silkscreen extent -2.2,0.02 -0.97,1.24, body extent -1.69,-2.77 5.35,-0.76, height 1.2
LED_0805 [mm] "LED 0805"
  rect 1.2x1.2 smd: 1(-1.05,0) 2(1.05,0)
  silkscreen extent -1,-0.7 1,0.7, body extent -1.02,-0.64 1.02,0.64, height 1.1
MOLEX_5268-2 [mm] "Conector Molex serie 5267 2 pin, paso 2.54mm acodado"
  rect 1.9x1.9 hole 0.9: 1(0,0)
  round 1.9 hole 0.9: 2(2.54,0)
  silkscreen extent -2.43,-6.48 5.06,1.39, body extent -2.43,-6.51 4.97,1.39, height 4.95
puls_C3682 [mm] "Pulsador acodado TH 4.5x4.5x5mm"
  rect 1.6x1.6 hole 1: 1(0,0)
  round 1.6 hole 1: 2(0,3.048) 3(-2.032,1.524)
  silkscreen extent -4.19,-0.76 0.89,3.81, body extent -4.19,-0.76 0.89,3.81, height 4.5
"QFN40_RHA (DATASHEET)" [mm]
  oval 0.85x0.28 smd paste+0 mask+0.14: 1(-3.26,2.255) 2(-3.26,1.755) 3(-3.26,1.255) 4(-3.26,0.755) 5(-3.26,0.255) 6(-3.26,-0.245) 7(-3.26,-0.745) 8(-3.26,-1.245) 9(-3.26,-1.745) 10(-3.26,-2.245) 21(3.26,-2.245) 22(3.26,-1.745) 23(3.26,-1.245) 24(3.26,-0.745) 25(3.26,-0.245) 26(3.26,0.255) 27(3.26,0.755) 28(3.26,1.255) 29(3.26,1.755) 30(3.26,2.255)
  oval 0.28x0.85 smd paste+0 mask+0.14: 11(-2.25,-3.255) 12(-1.75,-3.255) 13(-1.25,-3.255) 14(-0.75,-3.255) 15(-0.25,-3.255) 16(0.25,-3.255) 17(0.75,-3.255) 18(1.25,-3.255) 19(1.75,-3.255) 20(2.25,-3.255) 31(2.25,3.265) 32(1.75,3.265) 33(1.25,3.265) 34(0.75,3.265) 35(0.25,3.265) 36(-0.25,3.265) 37(-0.75,3.265) 38(-1.25,3.265) 39(-1.75,3.265) 40(-2.25,3.265)
  rect 4.472x4.472 smd paste+0 mask+0.14: 41(0,-0.254)
  silkscreen extent -3.5,-3.5 3.5,3.5, body extent -3.05,-3.05 3.05,3.05, height 0.97
"QLP36_4_4 (REFLOW)" [mil]
  oval 29x11 smd paste-2 mask+4: 1(-118.5,78.74) 2(-118.5,59.06) 3(-118.5,39.37) 4(-118.5,19.68) 5(-118.5,0) 6(-118.5,-19.68) 7(-118.5,-39.37) 8(-118.5,-59.06) 9(-118.5,-78.74) 19(118.5,-78.74) 20(118.5,-59.06) 21(118.5,-39.37) 22(118.5,-19.68) 23(118.5,0) 24(118.5,19.68) 25(118.5,39.37) 26(118.5,59.06) 27(118.5,78.74)
  oval 11x29 smd paste-2 mask+4: 10(-80.32,-118.5) 11(-60.63,-118.5) 12(-40.94,-118.5) 13(-21.26,-118.5) 14(-1.57,-118.5) 15(18.11,-118.5) 16(37.8,-118.5) 17(57.48,-118.5) 18(77.17,-118.5) 28(77.17,118.5) 29(57.48,118.5) 30(37.8,118.5) 31(18.11,118.5) 32(-1.57,118.5) 33(-21.26,118.5) 34(-40.94,118.5) 35(-60.63,118.5) 36(-80.32,118.5)
  rect 157.48x157.48 smd paste-2 mask+4: 37(-0.32,8.5)
  silkscreen extent -148,-135 135,148, body extent -120,-120 120,120, height 38
"QLP36_4_4 NORTEAM SILK (REFLOW)" [mil]
  oval 29x11 smd paste+0.1 mask+4: 1(-118.5,78.74) 2(-118.5,59.06) 3(-118.5,39.37) 4(-118.5,19.68) 5(-118.5,0) 6(-118.5,-19.68) 7(-118.5,-39.37) 8(-118.5,-59.06) 9(-118.5,-78.74) 19(118.5,-78.74) 20(118.5,-59.06) 21(118.5,-39.37) 22(118.5,-19.68) 23(118.5,0) 24(118.5,19.68) 25(118.5,39.37) 26(118.5,59.06) 27(118.5,78.74)
  oval 11x29 smd paste+0.1 mask+4: 10(-80.32,-118.5) 11(-60.63,-118.5) 12(-40.94,-118.5) 13(-21.26,-118.5) 14(-1.57,-118.5) 15(18.11,-118.5) 16(37.8,-118.5) 17(57.48,-118.5) 18(77.17,-118.5) 28(77.17,118.5) 29(57.48,118.5) 30(37.8,118.5) 31(18.11,118.5) 32(-1.57,118.5) 33(-21.26,118.5) 34(-40.94,118.5) 35(-60.63,118.5) 36(-80.32,118.5)
  rect 165.35x165.35 smd paste+0 mask+0: 37(-0.32,8.5)
  silkscreen extent -133,-135 135,135, body extent -120,-120 120,120, height 38
RGT16-1700X1700TP_SP [mm] "QFN, 16-Leads, Body 3x3mm, Pitch 0.5mm, Thermal Pad 1.7x1.7mm, TI Recommended"
  oval 0.85x0.28 smd paste-0.025 mask+0.07: 1(-1.475,0.75) 2(-1.475,0.25) 3(-1.475,-0.25) 4(-1.475,-0.75) 9(1.475,-0.75) 10(1.475,-0.25) 11(1.475,0.25) 12(1.475,0.75)
  oval 0.28x0.85 smd paste-0.025 mask+0.07: 5(-0.75,-1.475) 6(-0.25,-1.475) 7(0.25,-1.475) 8(0.75,-1.475) 13(0.75,1.475) 14(0.25,1.475) 15(-0.25,1.475) 16(-0.75,1.475)
  rect 1.7x1.7 smd paste-0.85 mask+0.07: 17(0,0)
  Top Layer lines w0.305: -0.152,0.152 0,0
  silkscreen extent -2.5,-1.73 1.73,1.73, body extent -1.57,-1.57 1.58,1.58, height 1
SOT26A-6M [mm]
  rect 1.3x0.7 smd: 1(-1.2,0.95) 2(-1.2,0) 3(-1.2,-0.95) 4(1.2,-0.95) 5(1.2,0) 6(1.2,0.95)
  silkscreen extent -1.32,-1.55 0.15,1.97, body extent -0.9,-1.55 0.9,1.55
stl21 [mm]
  rect 2.4x0.76 smd paste-0.01 mask+0.01: 1(2.035,-9.05) 2(-2.065,-9.05) 3(2.035,-7.78) 4(-2.065,-7.78) 5(2.035,-6.51) 6(-2.065,-6.51) 7(2.035,-5.24) 8(-2.065,-5.24) 9(2.035,-3.97) 10(-2.065,-3.97)
USB_C10418 [mm] "Micro USB 5C, TYPE B"
  rect 0.4x1.35 smd: 1(1.3,0) 2(0.65,0) 3(0,0) 4(-0.65,0) 5(-1.3,0)
  round 1.2 hole 0.7: 6(-2.425,-0.075) 8(2.425,-0.075)
  oval 1.2x1.6 hole 0.7 slot 1.1 at 90 deg: 7(-3.625,2.575) 9(3.625,2.575)
  silkscreen extent -4.32,-0.64 4.32,5.08, body extent -3.94,-0.64 3.94,4.44, height 3
XTAL_3215 [mm] "Cristal 3.2*1.5*0.9mm"
  rect 1.1x1.9 smd: 1(-1.25,0) 2(1.25,0)
  silkscreen extent -1.6,-0.75 1.6,0.75, body extent -1.6,-0.76 1.57,0.74, height 0.9
XTAL_3225 [mm] "Cristal 3.2*2.5*0.7"
  rect 1.4x1.2 smd paste-0.06 mask+0.05: 1(0,0) 2(2.2,0) 3(2.2,1.6) 4(0,1.6)
  silkscreen extent -0.5,-0.4 2.7,2.1, body extent -0.48,-0.41 2.69,2.08, height 0.7

## Part data
A1 A2: "Antenna single ended IIFA, 2450 MHz"
C1 C2 C3 C4 C5 C6 C7 C8 C9 C10 C11 C12 C13 C14 C15 C16 C17 C18 C19 C20 C21 C22 C23 C24 C25 C26 C27 C28 C29 C30 C31 C32 C33 C34 C35 C36 C37 C38 C39 C40 C41 C42 C43 C44 C45 C46 C47 C48 C49 C50 C51 C52 C53 C54 C55 C56 C57 C58 C59 C60 C61 C62 C63 C64 C65 C66 C67 C68: "Capacitor"
D1 D2 D3 D4 D5 D6 D7 D8: library part LED2, "Typical RED, GREEN, YELLOW, AMBER GaAs LED"
E1: library part Antenna, "Generic Antenna"
J1: "USB 2.0, Right Angle, SMT, B Type, Receptacle, 5 Position, Black"
P1 P2 P3: "Header, 5-Pin, Dual row"
P4: library part "Header 2", "Header, 2-Pin"
R1 R2 R3 R4 R5 R6 R7 R8 R9 R10 R11 R12 R13 R14 R15 R16 R17 R18 R19 R20 R21 R22 R23 R24 R25 R26 R27 R28 R29 R30 R31 R32 R33 R34 R35 R36 R37: "Resistor"
S1: "Switch"
U1: "USB Friendly 0.5 A Li+ Charger with Dynamic Power Management, 10.5 V OVP, 4.3 V, -40 to 85 degC, 16-pin QFN (RGT), Green (RoHS & no Sb/Br)"
U2 U6: "Single chip transceiver"
U4: "Push Button On/Off Controller"
U5: "Single chip BLE"
Y1 Y3 Y6: library part XTAL, "Crystal Oscillator"
Y2 Y4 Y5: library part XTAL_4, "Crystal Oscillator"

## Via types
v1: diameter 24, hole 12, Top Layer to Bottom Layer, 219 vias
v2: diameter 31.5, hole 12, Top Layer to Bottom Layer, 27 vias
v3: diameter 24, hole 12, Top Layer to Bottom Layer, tented top, 4 vias

## Nets (pads, with @x,y where several pads share a name; then routed paths per layer and width w, separated by ;. In a path a pad name is that pad's centre, name@x,y a point inside that pad or via, vN(x,y) a via of type N, cw(c..) or ccw(c..) an arc to the next point about the centre after c; other vN are vias at no path point)
AVDD_CC1110: C6.2 C11.2 C21.2 C22.2 C24.2 C25.2 C26.2 L9.1 U2.2 U2.10 U2.19 U2.22 U2.25 U2.26 U2.28 U2.29 | length 1829.4
  Top Layer w10: 1889.68,1664.21 1904.84,1649.06 U2.2@1936.5,1649.06 ; v1@1889.68,1729.68 v1(1890,1730) ; v1@1945,1471.5 U2.10@1974.68,1471.5 ; U2.29@2112.8,1708.5 2112.8,1747.52 2109.11,1751.2 2109.11,1753.2 2111,1755.09 2111,1755.31 2130,1755.31 ; U2.28@2132.48,1708.5 2132.48,1752.83 2130,1755.31 ; U2.19@2173.82,1511.26 2176.92,1508.16 2201.53,1508.16 C6.2@2210,1499.69 2210.31,1499.69 2210.31,1494.83 2221.02,1484.13 2224.81,1484.13 2240,1468.94 v1(2240,1455) ; U2.22@2173.82,1570.31 2209.96,1570.31 2218.12,1562.16 2247.84,1562.16 2260,1550 C11.2@2270.31,1550 ; U2.25@2173.82,1629.37 2204.37,1629.37 2215,1640 2240,1640 2245,1645 C22.2@2245,1665.31 2210,1665.31 2193.74,1649.06 U2.26@2173.82,1649.06 ; v1(2225,1760) 2208.94,1760 2207.69,1761.25 2147.31,1761.25 2146.06,1760 2130,1760 2130,1755.31 ; C22.2@2245.32,1665 v1(2300,1665) ; C11.2@2270.31,1544.69 C11.2@2270.31,1545 2275,1540.31 v1(2275,1520)
  Top Layer w20: C26.2@1865,1765.47 1890,1740.47 v1(1890,1730) ; 1889.68,1664.21 L9.1@1889.68,1695 v1@1889.68,1729.68
  Signal Layer 1 w10: v1(1945,1475) 1900,1475 1900,1720 v1(1890,1730) 1920,1760 v1(2225,1760) 2270,1760 2300,1730 v1(2300,1665) 2300,1544.57 2285.68,1530.26 v1@2285.68,1520
AVDD_CC2510: C40.2 C49.2 C52.2 C53.2 C56.2 C63.2 C64.2 L15.1 U6.2 U6.10 U6.19 U6.22 U6.25 U6.26 U6.28 U6.29 | length 1873.3
  Top Layer w10: L15.1@2115.31,2460.32 2114.84,2459.84 C53.2@2114.84,2410 2150.32,2410 2155.32,2415 ; 2165.56,2345 2155.32,2355.24 2155.32,2415 ; 2166.38,2344.28 2190,2320.67 C49.2@2190,2320 2192.52,2317.48 2243.08,2317.48 2247.6,2322 2292.29,2322 U6.29@2296.81,2317.48 U6.28@2296.81,2337.17 ; C49.2@2190,2325 C49.2@2192.5,2322.5 ; v1(2290,2115) 2335.53,2115 2356.26,2135.73 U6.2@2356.26,2141.5 ; C64.2@2305,2465 2375.94,2394.06 U6.25@2375.94,2378.5 ; C56.2@2310,2415 2310,2415.67 2285.67,2440 2220.32,2440 2207.32,2453 ; C56.2@2310,2420 2329.61,2420 2355.07,2394.54 2355.07,2379.69 U6.26@2356.26,2378.5 ; C64.2@2310,2470 C64.2@2310,2470.67 ; v1(2320.32,2500) 2310,2489.69 C64.2@2310,2470.67 ; U6.22@2435,2378.5 2435,2400.14 2443.16,2408.3 2443.16,2417.84 2460.63,2435.32 C63.2@2460.63,2465 2485.32,2489.69 v1(2485.32,2500) ; U6.19@2494.06,2378.5 2505.55,2390 2575,2390 2575,2365.32 v1(2580.32,2360) ; U6.10@2533.82,2179.69 C40.2@2580,2179.69 v1(2604.69,2179.69) ; 2155.32,2415 2193.32,2453 2207.32,2453 ; 2207.32,2453 2207.32,2482.53 2218.79,2494 2286.67,2494 C64.2@2310,2470.67
  Signal Layer 1 w10: v1(2320.32,2500) v1(2485.32,2500) 2545.32,2500 2580.32,2465 v1(2580.32,2360) 2585.63,2354.69 2585.63,2198.74 v1(2604.69,2179.69)
AVDD_CC2540: C33.2 C35.2 C37.2 C38.2 C39.2 C48.2 C51.2 C54.2 L10.1 U5.4 U5.10 U5.21 U5.24 U5.27 U5.28 U5.29 U5.31 U5.39 | length 2121.9
  Top Layer w10: v1@1509.69,2339.69 C48.2@1509.69,2305 1525,2305 1540,2290 1540,2275 1552,2263 1606.72,2263 1610.39,2259.33 U5.24@1626.65,2259.33 ; v1(1510,2130) C37.2@1469.53,2130 ; v1@1600,2425.32 C54.2@1630,2395.31 1626.65,2391.97 U5.21@1626.65,2318.39 ; U5.29@1626.65,2160.91 C39.2@1581.22,2160.91 ; U5.28@1626.65,2180.59 1600.91,2180.59 ; U5.27@1626.65,2200.28 1620.59,2200.28 1600.91,2180.59 ; U5.31@1666.42,2101.46 v1(1666.42,2066.1) C33.2@1645,2044.69 1555.31,2044.69 1533,2067 1505,2067 L10.1@1505,2074.68 1505,2094.53 C37.2@1469.53,2130 ; U5.39@1823.9,2101.46 1823.9,2095.69 1869.58,2050 C35.2@1870,2050 ; U5.10@1878.35,2318.39 1893.39,2318.39 v1(1920,2345) C51.2@1920,2389.41 ; U5.4@1878.62,2200 v1(1920,2200) ; C37.2@1469.53,2130 1499.21,2159.69 C38.2@1550,2159.69 C39.2@1580,2159.69 C39.2@1581.22,2160.91 ; C39.2@1581.22,2160.91 1600.91,2180.59
  Signal Layer 1 w10: v1(1510,2130) 1515,2135 v1(1515,2335) ; v1@1510,2340 v1(1600,2430) 1840,2430 v1@1925,2345 ; v1(1666.42,2066.1) v1(1848.9,2066.1) ; v1(1920,2200) v1(1920,2345)
CHARGING: D7.2 R13.1 U1.9 U2.6 U6.6 | length 1943.2
  Top Layer w10: U1.9@1373.07,1400.47 1511.57,1400.47 1530,1418.9 R13.1@1530,1480.47 ; D7.2@1530,1391.34 v1(1575,1436.34) ; v1(1875,1535) 1875,1541.06 1904.26,1570.32 U2.6@1936.5,1570.32 ; v1(2420,1995) 2420,2026.06 2433.32,2039.37 2433.32,2139.81 U6.6@2435,2141.5
  Signal Layer 1 w10: v1(1875,1535) 1845,1565 1845,1860 2049,2064 2409.94,2064 2424,2049.94 2424,1999 v1(2420,1995)
  Bottom Layer w10: v1(1575,1436.34) 1595.34,1416 1646,1416 1765,1535 v1(1875,1535)
CK_1110: P1.6 U2.11 | length 297.2
  Top Layer w10: v1(1965,1445) 1974.37,1445 1994.37,1465 U2.11@1994.37,1471.5 ; v1(1980,1285) 1981.3,1283.7 P1.6@1981.3,1198.7
  Bottom Layer w10: v1(1965,1445) 1965,1300 v1(1980,1285)
CK_2510: P3.6 U6.11 | length 381.9
  Top Layer w10: U6.11@2533.82,2199.37 2561.06,2199.37 2565.19,2203.5 2593.5,2203.5 2601.68,2211.68 v1(2609.63,2211.68) ; v1(2835,2240) 2841.3,2246.3 P3.6@2896.3,2246.3
  Bottom Layer w10: v1(2609.63,2211.68) 2610.94,2213 2808,2213 v1(2835,2240)
CK_2540: P2.6 U5.14 | length 759.5
  Top Layer w10: v1(1483.7,2648.7) P2.6@1483.7,2706.3 ; U5.14@1784.53,2358.15 1784.53,2389.53 1810,2415 v1(1810,2475)
  Bottom Layer w10: v1(1483.7,2648.7) 1555,2720 1765,2720 1795,2690 1795,2490 v1(1810,2475)
D_N: C31.1 R26.2 U5.3 | length 1179.3
  Top Layer w10: U5.3@1883.76,2181 1903.64,2181
  Top Layer w12: C31.1@1324.68,1910 1340.69,1894 1394.23,1894 1458.23,1830 1717.12,1830 1811.12,1924 1895.77,1924 1905.77,1934 1951.77,1980 1953.13,1980 1962.13,1989 2015.77,1989 2038.38,2011.62 2046,2019.23 2046,2150.77 2038.38,2158.38 2023.38,2173.38 2015.77,2181 1940,2181 1934,2175 1909.64,2175 1903.64,2181
  Top Layer w15: R26.2@1289.53,1910 C31.1@1324.68,1910
D_P: C27.1 R23.1 R24.2 U5.2 | length 1387.3
  Top Layer w10: U5.2@1883.35,2160.91 U5.2@1888.38,2160.91
  Top Layer w12: R24.2@1287.53,1860 1260,1887.53 1260,1957.48 1314.02,2011.5 1335.98,2011.5 1365,1982.48 1365,1935 1380,1920 1405,1920 1469,1856 1706.36,1856 1795,1944.64 1795,1946 1799,1950 1885,1950 1925.77,1990.77 1941,2006 1942.36,2006 1951.36,2015 2005,2015 2020,2030 2020,2140 2005,2155 1895.75,2155 U5.2@1889.75,2161
  Top Layer w15: R24.2@1287.53,1860 R24.2@1289.53,1860 R23.1@1364.53,1860
DC_1110: P1.3 U2.16 | length 168
  Top Layer w10: P1.3@2031.3,1360.12 2031.3,1389.29 2061.37,1419.36 2092.62,1419.36 2108.26,1435 2108.26,1444.8 2096.48,1456.58 2096.48,1458.68 2092.8,1462.37 U2.16@2092.8,1471.5
DC_2510: P3.3 U6.16 | length 188
  Top Layer w10: U6.16@2533.82,2297.8 2640.85,2297.8 2646.06,2303 2712.32,2303 P3.3@2717.52,2297.8
DC_2540: P2.3 U5.34 | length 1311.8
  Top Layer w10: v1(1345,2060) v1(1450,1955) ; P2.3@1433.7,2544.88 v1(1433.7,2603.82) ; U5.34@1725.47,2101.46 1726.42,2100.51 1726.42,2028.43 1734,2020.85 1734,1991 v1(1770,1955)
  Bottom Layer w10: v1(1345,2060) 1298,2107 1298,2423 1433.7,2558.7 v1(1433.7,2603.82) ; v1(1450,1955) v1(1770,1955)
DD_1110: P1.4 U2.15 | length 290.9
  Top Layer w10: v1@2030,1257.6 v1(2030,1260) ; P1.4@2031.3,1198.7 v1@2031.3,1256.3 ; v1(2070,1445) 2070,1446.22 2075,1451.22 2073.11,1453.11 U2.15@2073.11,1471.5
  Bottom Layer w10: v1(2030,1260) 2070,1300 v1(2070,1445)
DD_2510: P3.4 U6.15 | length 370
  Top Layer w10: U6.15@2533.82,2278.11 2534.71,2279 v1(2656,2279) ; v1(2835,2295) 2895,2295 P3.4@2896.3,2296.3
  Bottom Layer w10: v1(2656,2279) 2672,2295 v1(2835,2295)
DD_2540: P2.4 U5.35 | length 1400.9
  Top Layer w10: v1(1340,2105) 1455,1990 v1(1475,1990) ; v1(1395,2635) 1433.7,2673.7 P2.4@1433.7,2706.3 ; U5.35@1745.16,2101.46 1745.16,2087.19 1746.84,2085.51 1746.84,2037.7 1766,2018.54 1766,2010.06 1790,1986.06 v1(1790,1985)
  Bottom Layer w10: v1@1351.63,2104.69 1371.51,2104.69 1385.57,2118.75 1385.57,2138.63 1349.2,2175 1349,2175 1349,2364 1460,2475 1460,2615 1440,2635 v1(1395,2635) ; v1(1475,1990) 1490,1975 1756.06,1975 1766.06,1985 v1(1790,1985)
DN: J1.2 R26.1 | length 51.1
  Top Layer w10: J1.2@1170,1900.59 R26.1@1221.06,1900.59
DP: J1.3 R24.1 | length 66.7
  Top Layer w10: J1.3@1170,1875 1215.47,1875 R24.1@1230.47,1860
EN_LDO: R16.1 U3.3 U4.7 | length 441.3
  Top Layer w10: R16.1@1435,1694.53 1445.63,1705.16 U4.7@1498.58,1705.16 ; R16.1@1440,1694.53 1410,1664.53 1410.28,1664.24 1410.28,1614.72 1415.31,1609.69 1479.69,1609.69 v1(1480,1610) ; v1(1595,1525) 1650.16,1525 U3.3@1652.76,1527.6
  Bottom Layer w10: v1(1480,1610) 1565,1525 v1(1595,1525)
GND: A1.2 A2.2 C1.1 C2.1 C3.1 C4.1 C5.1 C6.1 C7.1 C8.1 C9.1 C10.1 C11.1 C12.1 C13.1 C16.1 C17.2 C18.1 C20.1 C21.1 C22.1 C23.1 C24.1 C25.1 C26.1 C27.2 C28.2 C29.2 C30.1 C31.2 C32.1 C33.1 C34.1 C35.1 C36.1 C37.1 C38.1 C39.1 C40.1 C41.1 C42.1 C44.2 C47.2 C48.1 C49.1 C50.1 C51.1 C52.1 C53.1 C54.1 C55.1 C56.1 C59.1 C60.1 C61.1 C62.1 C63.1 C64.1 C66.1 C67.1 C68.1 D1.2 D2.2 D3.2 D4.2 D5.2 D6.2 J1.4 J1.5 L8.2 L14.2 L16.2 P1.1 P2.1 P3.1 P4.1 R8.1 R10.1 R12.1 R14.1 R15.1 R17.1 R19.1 R20.1 R22.1 R28.1 R31.1 S1.1 U1.4 U1.8 U1.17 U2.37 U3.2 U4.1 U4.9 U5.1 U5.41 U6.37 | length 5066.6
  Top Layer w10: R19.1@1040.47,1675 R15.1@1040.47,1630 1040.47,1604.53 1055,1590 1145,1590 1195,1540 R12.1@1195,1519.53 ; R10.1@1220.47,1325 1220.47,1390.47 1230.47,1400.47 U1.4@1256.93,1400.47 1256.93,1400.66 1285.66,1400.66 U1.17@1315,1430 ; 1239.65,2155.75 v1@1319.25,2155.75 ; C50.1@1305,2424.68 v1(1305,2480) ; v1(1305,2550) 1378.58,2550 P2.1@1383.7,2544.88 ; v1(1325,1785) C27.2@1325,1820.31 ; C31.2@1325,1949.69 v1(1325,1985) ; v1(1325,2195) 1325.32,2195.32 C42.1@1360,2195.32 ; U1.8@1344.53,1371.93 1416.93,1371.93 v1(1420,1375) ; v1(1361.57,2128.69) 1361.31,2128.69 1360,2130 C37.1@1410.47,2130 ; R8.1@1374.53,1310 1377.99,1310 1397.99,1290 v1(1465,1290) ; v1(1410,2185) C41.1@1465.32,2185 ; v1(1435,2275) L14.2@1470.31,2275 ; v1(1435,2305) C48.1@1470.32,2305 ; C55.1@1530,2449.68 1585.74,2449.68 1590.06,2454 1610.69,2454 C54.1@1630,2434.68 C54.1@1630,2440 ; U4.9@1535,1715 1535,1705.9 1553.75,1687.16 1569.73,1687.16 U4.1@1571.42,1685.47 1596.57,1660.32 C20.1@1615,1660.32 1610,1655.32 v1(1610,1635) v1@1615,1630 ; v1(1550,2090) C38.1@1550,2120.32 C39.1@1580,2120.32 ; v1@1555,1995 v1(1550,2000) 1565.47,2015.47 R28.1@1600,2015.47 ; v1(1575,1795) R22.1@1620.47,1795 ; C30.1@1690,1890.32 1690.32,1890.32 v1(1725,1925) ; v1@1720,2645 v1(1725,2650) 1768.66,2650 D3.2@1768.66,2720 ; U5.41@1755,2240 1875.32,2119.68 C36.1@1920,2119.68 ; C7.1@1789.68,1460 1805,1475.31 v1(1805,1490) C9.1@1805,1525.32 ; v1@1890,2440 v1(1895,2435) ; v1@1890.59,2440.59 C51.1@1920,2440.59 ; v1(1919.68,2020.32) C35.1@1919.68,2050 ; C36.1@1920.16,2119.53 C34.1@1970,2119.53 ; v1(2055.32,2465) 2055.79,2464.53 C53.1@2055.79,2410 ; C24.1@2105,1794.68 2105.31,1795 v1(2220,1795) ; v1(2120.32,2320) C49.1@2150.63,2320 ; C44.2@2130.47,2245 2130.47,2279.84 v1(2120.32,2290) C47.2@2150.63,2290 ; C25.1@2144.69,1794.84 C28.2@2144.69,1830 2174.53,1859.84 C29.2@2174.53,1885 ; R31.1@2185.79,2375 v1(2225.79,2415) C56.1@2270.63,2415 ; C6.1@2210.32,1460 C5.1@2210.32,1420 v1(2210.32,1374.68) 2230.32,1354.68 C3.1@2285,1354.68 ; C21.1@2220,1704.68 2220,1735 v1(2245,1735) C22.1@2245,1704.68 ; v1(2235.32,2470) C64.1@2270.63,2470 ; v1(2245.32,1240.32) C1.1@2285,1240.32 ; C11.1@2309.68,1545 v1(2309.68,1520.32) C10.1@2340.94,1520.32 ; v1(2320,2575) C67.1@2360.63,2575 ; v1(2320.31,2539.69) L16.2@2360.31,2539.69 ; C18.1@2385,1645 v1(2385,1675) ; v1(2430.32,1530.32) C12.1@2430.32,1555 ; L8.2@2430.31,1675 v1(2430.31,1704.69) ; v1(2445,2655) C68.1@2445,2685 ; C66.1@2450.32,2539.69 v1(2484.69,2539.69) ; A2.2@2489.6,2726.59 2489.6,2685.4 v1(2490,2685) ; C63.1@2500,2465 v1(2540.31,2465) 2550.31,2455 C61.1@2605.63,2455 ; v1(2505,1380) C4.1@2505,1420.32 ; v1(2525.31,1590.31) C17.2@2525.31,1615 ; C52.1@2615,2390 2615,2375 2625,2365 v1(2630,2365) ; D2.2@2696.34,1235 D1.2@2696.34,1315 v1(2750,1315) ; C59.1@2725,2455 C62.1@2770.63,2455 v1(2770.63,2484.69) ; C60.1@2885,2455 v1(2915.31,2455)
  Top Layer w12: v1(1815,1685) 1815,1684.53 R17.1@1849.53,1650
  Top Layer w20: C2.1@1119.53,1280 1164.53,1325 R10.1@1220.47,1325 ; J1.5@1145,1823.82 J1.4@1145,1849.41 ; J1.5@1170,1823.82 1231.18,1823.82 1302.4,1752.6 1302.4,1615 1364.53,1615 R14.1@1380,1599.53 1437.13,1542.4 1465.03,1570.31 1520,1570.31 ; 1365,1615.47 C23.1@1365,1667.6 ; v1(1520,1605) 1520,1570.31 ; R28.1@1600,2015.47 1610.16,2005.32 C33.1@1645,2005.32 1660,1990.32 C32.1@1675,1990.32 ; U3.2@1652.76,1565 1590.31,1565 C13.1@1590,1565.32 1590,1570.31 1520,1570.31 ; v1(1815,1825) 1815.47,1824.53 C26.1@1865,1824.53 ; P1.1@2081.3,1360.12 2134.88,1360.12 v1(2135,1360) ; v1(2545,2140) 2545.32,2140.32 C40.1@2580,2140.32 ; D6.2@2591.34,1910 D5.2@2591.34,1980 v1(2640,1980) ; P3.1@2734.88,2346.3 v1(2734.88,2379.88)
  other v1: 2570,1405 2570,1460 2515,1515 2570,1515 2570,1570 2345,1685 2520,1690 2570,1690 2345,1740 2570,1745 2345,1800 2400,1800 2455,1800 2515,1800 2570,1800 2300,1930 2300,2000 2140,2010 1305,2055 2140,2105 1325,2150 1325,2275 1565,2449.68 2580,2505 2530,2530 2575,2565 2445,2605 2315,2615 2360,2615 2580,2615 2635,2615 2690,2615 2745,2615 2800,2615 2855,2615 2910,2615 1305,2620 2040,2660 2095,2660 2150,2660 2205,2660 2260,2660 2315,2660 2360,2660 2530,2665 2580,2665 2635,2665 2690,2665 2745,2665 2800,2665 2855,2665 2910,2665 1305,2680
  other v2: 1995,1530 2055,1530 2115,1530 1995,1590 2055,1590 2115,1590 1995,1650 2055,1650 2115,1650 1690,2165 1755,2165 1820,2165 2355.32,2200 2415.32,2200 2475.32,2200 1690,2230 1755,2230 1820,2230 2355.32,2260 2415.32,2260 2475.32,2260 1690,2295 1755,2295 1820,2295 2355.32,2320 2415.32,2320 2475.32,2320
  other v3: 1295.32,1410.31 1334.69,1410.32 1295.32,1449.68 1334.69,1449.69
IRQ_C1110: U2.1 U5.19 | length 1218.3
  Top Layer w10: U5.19@1686.1,2358.15 v1(1686.1,2388.9) ; U2.1@1936.5,1668.74 1936.5,1748.65 1925,1760.15 1925,1845 2007,1927 2092,1927 v1(2100,1935)
  Bottom Layer w10: v1(1686.1,2388.9) 1740,2335 1885,2335 1900,2320 2043.32,2320 2098.32,2265 2098.32,2006.68 2100,2005 2100,1965 v1(2100,1935)